# Altium PCB PCB.PcbDoc (part 2 of 3)
Units mm, origin at the board's own origin, x right, y up, seen from the top; angles counter-clockwise.
Board outline 68.58 x 53.34 mm, 4 copper layers (TOP, GND, SIG, BOTTOM), stack 1.586 mm thick; 257 components, 121 nets, 724 pads, 316 vias.
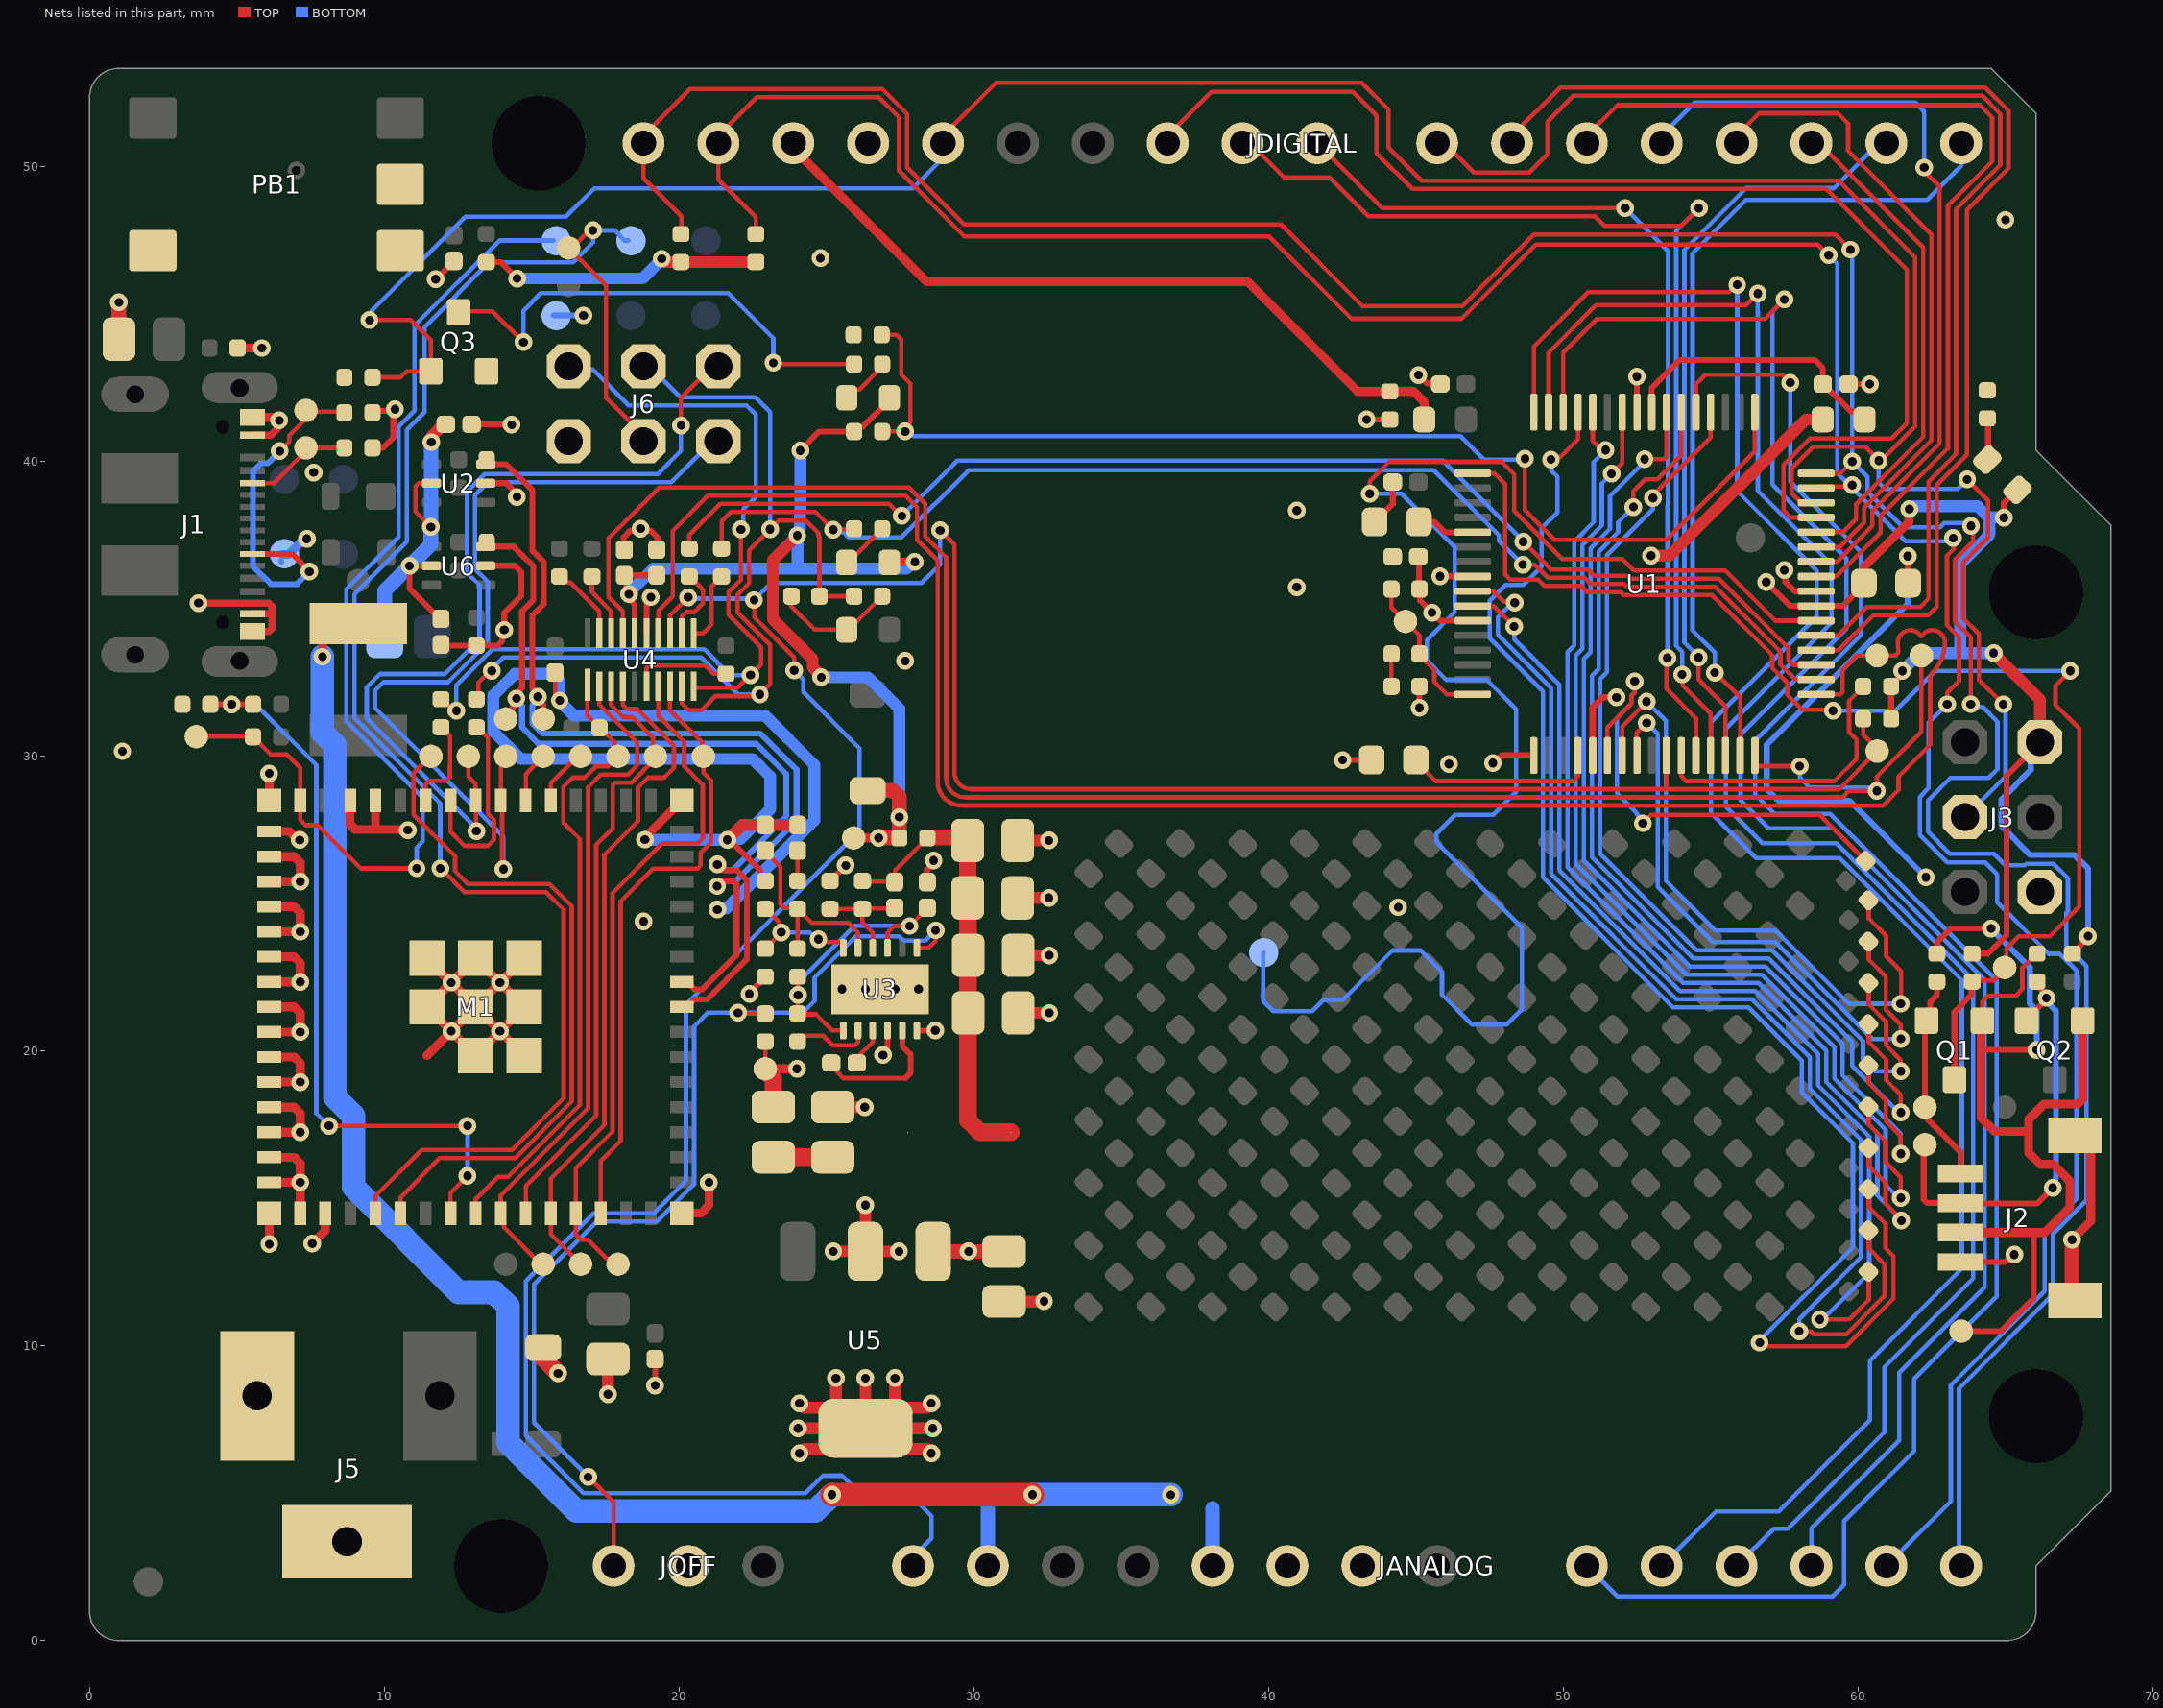
[diagram p4: the nets of this part, all layers, seen from the top]

## Via types
v1: diameter 0.6, hole 0.3, TOP to BOTTOM, tented both sides, 316 vias

## Nets (pads, with @x,y where several pads share a name; then routed paths per layer and width w, separated by ;. In a path a pad name is that pad's centre, name@x,y a point inside that pad or via, vN(x,y) a via of type N, cw(c..) or ccw(c..) an arc to the next point about the centre after c; other vN are vias at no path point) (continued)
+3V3_I2C: 3V3_IC.X F1.1 J2.2 Q1.1 Q2.1 R9.1 R11.1 | length 91.3
  TOP w0.15: Q1.1@64.22,21.035 64.22,21.689 64.411,21.88 65.35,21.88 65.572,22.102 65.572,22.816 ccw(c64.97,22.834) 65.572,22.826 R11.1@66.055,23.309
  TOP w0.2: R9.1@62.67,23.309 62.67,23.684 63.144,24.159 v1(64.51,24.159) ; 3V3_IC.X@63.5,10.5 64.837,10.5 65.954,11.617 65.954,13.846 ; 64.17,20.134 64.264,20.04 v1(66.06,20.04) ; R11.1@66.055,23.309 R11.1@66.07,23.309
  TOP w0.3: v1(7.904,33.382) 7.904,33.953 8.454,34.503 F1.1@9.125,34.503 ; J2.2@63.482,13.846 65.954,13.846 66.329,13.846 67.181,14.698 67.181,15.6 66.623,16.158 66.181,16.158 65.787,16.552 65.787,17.273 ; Q1.1@64.22,21.035 64.17,20.985 64.17,20.134 64.17,17.734 64.632,17.273 65.787,17.273 ; Q2.1@67.62,21.035 67.62,18.377 67.444,18.202 66.306,18.202 65.787,17.683 65.787,17.273
  TOP w0.8: v1(25.19,4.956) v1(31.99,4.956)
  BOTTOM w0.2: v1(64.51,24.159) 65.827,22.842 65.827,21.621 66.06,21.388 v1(66.06,20.04)
  BOTTOM w0.8: v1(7.904,33.382) 7.904,30.811 8.325,30.39 8.325,18.435 8.952,17.809 8.952,15.396 12.529,11.819 13.729,11.819 14.198,11.35 14.198,6.712 16.512,4.398 24.632,4.398 v1(25.19,4.956) ; v1(31.99,4.956) 31.995,4.951 v1(36.684,4.951)
+5V: 5V_TOP.X C2.2 C3.2 C24.2 C25.2 C28.2 C29.2 C30.2 D2.C DL1.A DL3.A DL4.A J3.2 JANALOG.2 JANALOG.5 L2.1 R3.2 R4.2 R5.2 R6.2 R7.1 R8.1 R10.1 R12.1 R13.1 R36.2 R59.2 SJ1.1 U1.11 U1.21 U1.39 U2.5 U4.16 U5.1 U6.5 | length 126.8
  TOP w0.15: v1(11.583,37.779) 11.062,38.3 11.062,39.162 11.166,39.266 U2.5@11.605,39.266
  TOP w0.2: v1(10.859,36.462) 10.859,35.691 11.735,34.815 11.735,34.809 11.925,34.619 C29.2@11.925,34.566 ; v1@10.859,36.466 U6.5@11.605,36.466 ; R3.2@13.466,46.769 13.949,46.769 v1(14.509,46.21) ; v1@18.139,35.509 v1@18.291,35.509 ; v1@18.224,35.424 18.496,35.152 U4.16@18.496,34.176 ; v1(18.3,35.5) v1@18.291,35.509 ; C25.2@19.246,36.141 C24.2@18.146,36.141 18.223,36.064 18.223,35.577 v1@18.291,35.509 ; v1(24.116,40.376) 24.761,41.021 R59.2@25.941,41.021 26.106,41.186 26.238,41.186 27.141,42.089 DL4.A@27.141,42.164 ; v1(43.328,41.428) R6.2@44.115,41.428 ; C3.2@45.081,36.776 45.101,36.756 45.101,35.696 R13.1@45.121,35.676 45.136,35.661 45.136,35.286 v1(45.546,34.876) 45.819,34.603 U1.11@46.925,34.603 ; v1(56.888,35.913) 57.698,35.103 U1.39@58.575,35.103 59.473,35.103 60.196,35.826 C2.2@60.196,35.876 ; R8.1@61.121,31.276 R7.1@61.121,32.376 61.121,32.413 61.5,32.792 v1(61.5,32.9) ; R10.1@63.87,23.309 64.406,23.31 65.037,23.941 65.037,29.35 J3.2@66.167,30.48 ; v1(64.945,38.098) 64.945,38.6 65.384,39.04 DL3.A@65.41,39.04 ; R12.1@67.27,23.309 67.27,23.316 67.8,23.846 v1(67.8,23.9)
  TOP w0.22: U1.21@51,30.028 51,31.666 51.335,32.001 v1(51.807,32.001)
  TOP w0.3: 5V_TOP.X@25.925,27.235 v1(26.773,27.235) ; DL1.A@27.141,36.576 27.153,36.588 27.988,36.588 v1(28,36.6) ; C2.2@60.196,35.876 60.196,36.421 61.722,37.947 61.722,38.368 v1(61.741,38.388)
  TOP w0.4: v1@11.608,40.672 11.633,40.697 11.633,40.88 11.929,41.176 11.975,41.176 C30.2@12.077,41.278 ; v1(19.416,46.88) 19.526,46.77 R4.2@20.066,46.769 R4.2@20.066,46.769 R5.2@22.606,46.769 ; v1(24.016,37.494) 23.181,36.659 23.181,34.655 24.536,33.3 24.536,33.026 24.825,32.736 v1(24.825,32.682) ; v1(52.98,36.81) 53.607,36.81 58.225,41.428 L2.1@58.8,41.428 ; v1(64.6,33.5) 66.167,31.933 J3.2@66.167,30.48
  TOP w0.5: D2.C@26.396,28.841 27.259,28.841 27.475,28.625 v1(27.475,27.937) R36.2@27.475,27.235 v1(26.773,27.235) ; U5.1@28.625,13.206 v1(29.825,13.206) C28.2@31.025,13.206
  BOTTOM w0.2: J3.2@66.167,30.48 65.86,30.173 65.86,29.54 64.86,28.54 64.86,27.64 65.845,26.654 67.346,26.654 67.8,26.2 v1(67.8,23.9)
  BOTTOM w0.3: JANALOG.2@30.48,2.54 JANALOG.2@30.523,2.497
  BOTTOM w0.4: v1(14.509,46.21) 18.766,46.21 19.416,46.86 v1(19.416,46.88) ; v1(18.3,35.5) 18.3,35.543 19.123,36.366 23.966,36.366 ; v1(24.016,37.494) 24.018,37.491 24.018,36.418 23.966,36.366 ; v1@24.106,37.726 24.106,38.263 24.116,38.273 v1(24.116,40.376) ; v1(24.825,32.682) 26.418,32.682 27.475,31.625 v1(27.475,27.937) ; v1(28,36.6) 27.946,36.6 27.712,36.366 23.966,36.366 ; v1(61.5,32.9) 62.1,33.5 63.462,33.5 ; v1(61.741,38.388) 61.813,38.388 61.91,38.485 64.053,38.485 64.429,38.108 ; v1(64.6,33.5) 63.462,33.5 ; v1(64.945,38.098) 64.935,38.108 64.429,38.108 ; 63.462,33.5 63.462,36.518 64.085,37.142 64.453,37.509 64.453,37.558 64.457,37.562 64.457,38.081 64.429,38.108
  BOTTOM w0.5: SJ1.1@10.016,34.066 10.016,35.619 v1(10.859,36.462) 11.583,37.186 v1(11.583,37.779) 11.589,37.785 11.589,40.654 v1(11.595,40.659) ; JANALOG.2@30.48,2.54 30.48,4.48 ; JANALOG.5@38.1,2.54 38.1,4.48
AREF_1: JDIGITAL.16 L1.1 R6.1 | length 25.7
  TOP w0.3: JDIGITAL.16@23.876,50.8 23.876,50.624 28.4,46.1 39.3,46.1 43.022,42.378 R6.1@44.115,42.378 44.922,42.378 45.28,42.02 L1.1@45.28,41.428
CC1_1: CC1.X J1.A5 R50.2 | length 3.5
  TOP w0.15: J1.A5@5.525,39.266 6.25,39.266 7.35,40.366 CC1.X@7.35,40.466 R50.2@8.45,40.466
CC2_1: CC2.X J1.B5 R51.2 | length 11.8
  TOP w0.15: v1(6.456,40.354) 6.771,40.668 6.771,40.887 7.226,41.342 7.226,41.612 CC2.X@7.35,41.736 7.388,41.698 8.412,41.698 R51.2@8.45,41.66
  TOP w0.2: J1.B5@5.525,36.866 6.874,36.866 7.463,36.277 v1(7.463,36.267)
  BOTTOM w0.2: v1(6.456,40.354) 6.045,39.942 5.812,39.942 5.55,39.68 5.55,36.442 6.151,35.84 7.036,35.84 v1(7.463,36.267)
ESP32_ENABLE_1: ESP_EN_BOTTOM.X ESP_EN_TOP.X M1.45 R26.2 | length 36.8
  TOP w0.15: ESP_EN_TOP.X@3.625,30.666 R26.2@5.55,30.666 6.15,30.066 6.699,30.066 7.15,29.615 M1.45@7.15,28.5 7.15,27.85 7.334,27.666 7.734,27.666 9.2,26.2 v1(11.1,26.2)
  BOTTOM w0.15: v1(11.1,26.2) 11.1,26.914 11.302,27.116 11.302,28.604 8.718,31.188 8.718,35.675 10.49,37.448 10.49,41.195 11.025,41.73 11.025,44.617 13.906,47.498 ESP_EN_BOTTOM.X@15.748,47.498
ESP_1_N: D-_TOP.X M1.23 R53.1 U6.3 | length 29.6
  TOP w0.2: U6.3@13.445,37.116 13.445,37.236 R53.1@13.475,37.266 ; R53.1@13.475,37.116 14.389,37.116 14.697,36.808 15.059,36.446 15.059,35.309 14.673,34.923 14.673,32.314 14.484,32.126 v1@14.484,32.018 ; D-_TOP.X@14.125,31.27 14.125,31.412 14.408,31.694 14.408,31.887 v1(14.484,31.964) ; M1.23@20.1,21.5 20.3,21.5 20.4,21.6 20.4,21.633 20.517,21.75 20.945,21.75 22.303,23.108 22.303,25.805 21.976,26.132 21.969,26.132 21.964,26.137 21.498,26.137 v1(21.304,26.332)
  BOTTOM w0.2: v1(14.484,31.964) 14.484,31.909 14.673,31.721 14.673,30.987 15.236,30.425 22.62,30.425 23.64,29.405 23.64,27.971 21.8,26.132 21.612,26.132 21.412,26.332 v1(21.304,26.332)
ESP_1_P: D+_TOP.X M1.24 R21.1 U2.3 | length 31.7
  TOP w0.2: U2.3@13.445,39.916 14.129,39.916 15.027,39.018 15.027,36.973 15.409,36.591 15.409,35.164 15.023,34.778 15.023,32.314 15.211,32.126 15.211,31.909 15.395,31.726 D+_TOP.X@15.395,31.27 ; M1.24@20.1,22.35 20.3,22.35 20.4,22.25 20.4,22.217 20.517,22.1 20.8,22.1 21.953,23.253 21.953,25.66 21.831,25.782 21.482,25.782 v1(21.295,25.595)
  BOTTOM w0.2: v1(15.211,32.018) 15.211,31.909 15.023,31.721 15.023,31.132 15.38,30.775 22.765,30.775 23.99,29.55 23.99,27.826 21.945,25.782 21.589,25.782 21.403,25.595 v1(21.295,25.595)
ESP_DOWNLOAD_1: ESP_DOWNLOAD_BOTTOM1.X ESP_DOWNLOAD_TOP.X J6.4 M1.4 | length 56.9
  TOP w0.15: M1.4@9.7,14.5 9.7,15.08 11.268,16.648 14.327,16.648 16.084,18.405 16.084,24.8 15.486,25.397 12.723,25.397 11.92,26.2 v1(11.9,26.2) ; ESP_DOWNLOAD_TOP.X@16.256,47.244 17.525,45.975 17.525,42.165 J6.4@18.796,40.894 ; ESP_DOWNLOAD_TOP.X@16.358,47.234 16.968,47.843 v1(17.08,47.843)
  BOTTOM w0.15: v1(11.9,26.2) 11.9,28.397 8.995,31.303 8.995,35.503 10.767,37.276 10.767,41.08 11.366,41.679 11.366,44.566 13.554,46.754 16.399,46.754 17.08,47.435 v1@17.08,47.717 ; v1@17.143,47.843 17.82,47.843 18.165,47.498 ESP_DOWNLOAD_BOTTOM1.X@18.288,47.498
ESP_IO1_1: ESP_IO1.X M1.5 | length 23.5
  TOP w0.15: M1.5@10.55,14.5 10.55,15.041 11.88,16.371 14.441,16.371 16.361,18.291 16.361,24.914 15.601,25.674 12.838,25.674 12.402,26.11 12.402,26.608 10.998,28.012 10.998,29.433 11.565,30 ESP_IO1.X@11.585,30
ESP_IO4_1: ESP_IO4.X M1.8 R58.1 U4.1 | length 21.2
  TOP w0.15: M1.8@13.1,14.5 13.1,14.975 13.859,15.734 14.196,15.734 16.638,18.176 16.638,27.194 16.081,27.75 16.081,28.967 16.39,29.276 16.792,29.276 17.18,29.663 17.598,29.663 17.754,29.819 ESP_IO4.X@17.754,29.881 ; U4.1@16.896,32.426 16.896,31.385 17.3,30.981 R58.1@17.3,30.966 ; R58.1@17.425,30.866 17.811,30.48 17.811,30.124 ESP_IO4.X@17.935,30
ESP_IO5_1: ESP_IO5.X M1.9 U4.2 | length 23
  TOP w0.15: M1.9@13.95,14.2 14.04,14.2 14.065,14.175 14.065,14.025 15.315,12.775 ESP_IO5.X@15.395,12.775 ; M1.9@13.95,14.5 13.95,15.096 16.915,18.061 16.915,27.607 16.915,28.951 17.351,29.386 18.267,29.386 18.58,29.699 18.58,30.467 17.296,31.751 U4.2@17.296,32.376
ESP_IO6_1: ESP_IO6.X M1.10 U4.3 | length 20.9
  TOP w0.15: M1.10@14.8,14.5 14.8,15.43 17.192,17.822 17.192,27.003 17.752,27.563 17.752,29.022 17.84,29.109 18.382,29.109 19.205,29.932 ESP_IO6.X@19.205,30.057 ; U4.3@17.696,32.376 17.696,31.743 18.109,31.33 18.425,31.33 19.125,30.63 19.125,30.08 ESP_IO6.X@19.205,30
ESP_IO7_1: ESP_IO7.X M1.11 U4.4 | length 22.7
  TOP w0.15: M1.11@15.65,14.2 15.65,13.79 ESP_IO7.X@16.665,12.775 ; M1.11@15.65,14.5 15.65,15.68 17.469,17.499 17.469,26.662 18.608,27.801 18.608,28.944 18.94,29.276 19.489,29.276 19.828,29.615 19.828,30.363 18.584,31.607 18.237,31.607 18.096,31.748 U4.4@18.096,32.376
ESP_IO8_1: ESP_IO8.X M1.12 U4.7 | length 23.6
  TOP w0.15: ESP_IO8.X@17.935,12.599 17.567,12.967 17.543,12.967 16.91,13.6 16.68,13.6 16.5,13.78 M1.12@16.5,14.5 16.5,16.03 17.746,17.276 17.746,25.366 19.428,27.048 20.638,27.048 20.806,27.215 20.806,29.031 20.173,29.664 20.173,30.497 19.296,31.374 U4.7@19.296,32.376
ESP_IO9_1: ESP_IO9.X M1.13 U4.8 | length 20.9
  TOP w0.15: M1.13@17.35,14.5 17.35,16.28 18.023,16.953 18.023,25.088 19.125,26.19 20.624,26.19 20.733,26.299 20.733,26.722 21.083,27.072 21.083,29.183 20.825,29.441 ESP_IO9.X@20.825,30 ; U4.8@19.696,32.376 19.696,31.57 20.789,30.477 20.789,30.077 ESP_IO9.X@20.846,30.021
ESP_IO41_1: ESP_MTDI.X J6.2 M1.37 | length 30.6
  TOP w0.15: M1.37@13.944,28.494 13.998,28.44 13.998,26.224 v1(14.046,26.176) ; M1.37@13.957,28.493 13.957,29.656 14.125,29.824 ESP_MTDI.X@14.125,30
  BOTTOM w0.15: v1(14.046,26.176) 14.046,27.285 9.684,31.647 9.684,32.237 9.964,32.518 11.624,32.518 11.901,32.518 12.163,32.518 13.511,33.866 13.511,34.127 13.511,34.404 13.511,35.923 13.079,36.355 13.079,38.865 13.516,39.302 19.744,39.302 J6.2@21.336,40.894
ESP_IO42_1: ESP_MTMS.X J6.1 M1.38 | length 30.2
  TOP w0.15: ESP_MTMS.X@12.855,30 12.855,29.315 13.1,29.07 M1.38@13.1,28.5 13.113,28.487 13.113,27.479 v1(13.125,27.466) ; v1(20.071,41.227) 20.066,41.231 20.066,42.164 J6.1@21.336,43.434
  BOTTOM w0.15: v1(13.125,27.466) 13.125,27.564 9.407,31.282 9.407,32.352 9.85,32.795 12.048,32.795 13.234,33.98 13.234,35.809 12.802,36.24 12.802,38.98 13.401,39.579 19.284,39.579 20.071,40.366 v1(20.071,41.227)
ESP_MTCK_1: ESP_MTCK.X M1.35 | length 2
  TOP w0.15: M1.35@15.65,28.5 15.65,29.085 ESP_MTCK.X@16.565,30 ; ESP_MTCK.X@16.565,29.7 ESP_MTCK.X@16.665,29.7
ESP_MTDO_1: ESP_MTDO.X M1.36 | length 1.7
  TOP w0.15: M1.36@14.8,28.5 14.8,29.405 ESP_MTDO.X@15.395,30
ESP_RXD0_1: J6.5 R18.1 U4.10 | length 31.4
  TOP w0.15: R18.1@11.94,31.926 11.991,31.926 12.365,31.551 v1(12.45,31.551) ; U4.10@20.496,32.376 20.521,32.351 20.521,32.324 21.987,32.324 v1(22.423,32.76) 22.781,33.117 22.781,33.703 21.683,34.801 21.683,35.57 22.1,35.986 v1(22.1,37.7)
  BOTTOM w0.15: v1(12.45,31.551) 12.45,32.413 13.666,33.629 20.863,33.629 21.732,32.76 v1(22.423,32.76) ; J6.5@16.256,43.434 16.571,43.119 17.081,43.119 18.296,41.904 22.287,41.904 22.6,41.591 22.6,38.8 22.186,38.386 22.186,37.786 v1(22.1,37.7)
ESP_TXD0_1: J6.3 R17.1 R20.1 R23.1 U4.9 | length 36
  TOP w0.15: R17.1@13.197,31.907 13.197,32.5 13.596,32.899 v1(13.646,32.899) ; U4.9@20.096,32.376 20.096,31.801 20.333,31.564 20.756,31.564 ; 21.12,31.928 20.756,31.564 ; v1@22.691,32.047 21.239,32.047 20.756,31.564 ; v1(22.745,32.101) 23.1,32.456 23.1,33.776 21.99,34.886 21.99,35.485 22.377,35.872 22.377,36.993 v1(23.088,37.704) 23.379,37.996 24.304,37.996 24.729,37.571 24.729,37.481 24.765,37.445 R20.1@24.765,35.433 R23.1@25.941,35.433
  BOTTOM w0.15: v1(13.646,32.899) 13.646,32.956 14.042,33.352 20.748,33.352 21.999,32.101 v1(22.745,32.101) ; J6.3@18.796,43.434 20.049,42.181 22.585,42.181 23.088,41.678 v1(23.088,37.704)
EXT_SCL_1: EXT_SCL.X J2.4 Q1.2 R9.2 | length 7.2
  TOP w0.2: R9.2@62.67,22.359 62.67,21.89 62.448,21.667 62.448,21.162 Q1.2@62.32,21.035 62.27,20.984 EXT_SCL.X@62.27,18.096 62.384,17.981 62.384,17.659 63.482,16.561 J2.4@63.482,15.846
EXT_SDA_1: EXT_SDA.X J2.3 Q2.2 R11.2 | length 14.9
  TOP w0.2: EXT_SDA.X@62.27,16.826 62.225,16.781 62.225,14.963 62.342,14.846 J2.3@63.482,14.846 63.5,14.828 66.071,14.828 v1(66.604,15.361) ; Q2.2@65.72,21.035 65.72,21.085 66.391,21.756 v1(66.391,21.802) 66.391,21.91 66.235,22.066 66.235,22.194 R11.2@66.07,22.359
  BOTTOM w0.2: v1(66.391,21.802) 66.391,21.694 66.709,21.376 66.709,15.678 66.68,15.65 66.68,15.437 v1(66.604,15.361)
GND: C1.2 C2.1 C3.1 C5.1 C6.2 C7.1 C8.1 C9.1 C10.1 C11.1 C15.1 C16.1 C17.1 C18.1 C19.1 C20.2 C21.1 C22.1 C23.1 C24.1 C25.1 C26.1 C28.1 C29.1 C30.1 GND2.X GND.X J1.A1 J1.A12 J1.B1 J1.B12 J2.1 J2.FIX J3.6 J5.2 J5.3 J6.6 JANALOG.6 JANALOG.7 JDIGITAL.15 JOFF.2 M1.1 M1.2 M1.42 M1.43 M1.46 M1.47 M1.48 M1.49 M1.50 M1.51 M1.52 M1.53 M1.54 M1.55 M1.56 M1.57 M1.58 M1.59 M1.60 M1.61 M1.62 M1.63 M1.64 M1.65 PB1.1 PB1.2 PB1.5 Q3.2 R1.1 R19.2 R24.1 R39.1 R40.1 R43.1 R44.1 R50.1 R51.1 R52.1 R57.1 R60.1 U1.8 U1.17 U1.40 U1.57 U2.2 U3.6 U3.13 U4.15 U5.2 U5.4 U6.2 | length 190.5
  TOP w0.15: C26.1@15.796,32.841 15.796,32.137 15.952,31.981 v1(15.952,31.9)
  TOP w0.2: R50.1@9.6,40.466 9.966,40.466 10.312,40.812 10.312,41.727 v1(10.363,41.778) 10.304,41.719 9.772,41.719 9.737,41.684 R51.1@9.737,41.66 ; v1(11.741,46.187) 11.755,46.187 12.366,46.798 C1.2@12.366,46.809 ; C29.1@11.925,33.796 11.965,33.756 13.853,33.756 14.005,33.908 14.005,34.223 v1(14.072,34.29) 14.072,34.872 14.653,35.453 14.653,36.247 14.434,36.466 U6.2@13.445,36.466 ; C30.1@12.96,41.266 12.963,41.263 14.309,41.263 v1(14.321,41.25) ; U2.2@13.445,39.266 14.134,39.266 14.5,38.9 v1(14.5,38.8) ; v1@14.245,41.327 v1@14.298,41.274 ; C24.1@18.146,37.011 18.121,37.036 18.121,37.426 18.343,37.648 18.617,37.648 v1(18.694,37.724) 18.77,37.648 19.045,37.648 19.267,37.426 19.267,37.036 C25.1@19.242,37.011 ; U4.15@18.896,34.176 18.896,35.144 19.044,35.292 v1(19.044,35.4) ; v1(19.19,8.656) C11.1@19.19,9.556 ; v1@21.715,27.172 22.765,26.122 22.765,25.935 R43.1@22.925,25.775 ; v1@22.389,21.982 22.925,22.518 R44.1@22.925,22.525 ; R40.1@25.134,25.777 25.138,25.777 25.656,26.295 v1(25.656,26.299) ; U3.6@28.075,20.7 v1(28.699,20.7) ; C20.2@28.425,25.735 28.417,25.743 28.417,26.15 28.639,26.373 v1(28.639,26.466) ; v1(42.515,29.876) C5.1@43.496,29.876 ; C9.1@43.6,37.953 44.215,38.568 C8.1@44.215,39.306 ; v1(45.086,42.938) 45.381,42.643 45.815,42.643 C7.1@45.83,42.628 ; v1@45.12,31.645 R19.2@45.121,32.376 ; v1(45.819,36.11) 45.822,36.106 46.921,36.106 U1.8@46.925,36.103 ; v1(47.611,29.771) 47.654,29.771 47.915,30.032 48.975,30.032 48.979,30.028 U1.17@49,30.028 ; v1(52.498,42.884) 52.5,42.882 U1.57@52.5,41.678 ; v1(57.501,36.314) 57.539,36.276 57.539,35.914 57.85,35.603 U1.40@58.575,35.603 ; C6.2@59.67,42.628 v1(60.398,42.628) v1@60.506,42.628 ; v1(61.684,36.795) 61.69,36.789 61.69,35.882 C2.1@61.696,35.876 ; J2.1@63.448,12.88 J2.1@63.482,12.846 64.988,12.846 65.242,13.1 v1(65.3,13.1)
  TOP w0.25: v1(3.7,35.2) 6.083,35.2 6.2,35.083 6.2,34.9 ; J1.A12@5.525,34.231 6.083,34.231 6.2,34.348 6.2,34.9 ; J1.B1@5.525,34.841 6.141,34.841 6.2,34.9 ; J1.B12@5.525,40.891 6.155,40.891 6.401,41.137 6.401,41.234 6.441,41.274 v1(6.441,41.396)
  TOP w0.3: R39.1@5.025,43.853 v1(5.85,43.853) ; J1.A1@5.525,41.501 6.254,41.502 6.302,41.453 6.384,41.453 v1(6.441,41.396) ; v1(6.098,29.419) v1(6.098,29.419) 6.099,28.501 M1.65@6.1,28.5 ; v1(6.1,13.45) M1.62@6.1,14.5 ; M1.60@6.1,15.55 v1(7.15,15.55) ; M1.59@6.1,16.4 6.946,16.4 7.15,16.196 v1(7.15,15.55) ; M1.58@6.1,17.25 v1(7.15,17.25) 7.15,17.896 6.946,18.1 M1.57@6.1,18.1 ; M1.56@6.1,18.95 v1(7.15,18.95) 7.15,19.596 6.946,19.8 M1.55@6.1,19.8 ; M1.54@6.1,20.65 v1(7.15,20.65) 7.15,21.296 6.946,21.5 M1.53@6.1,21.5 ; M1.52@6.1,22.35 v1(7.15,22.35) 7.15,22.996 6.946,23.2 M1.51@6.1,23.2 ; M1.50@6.1,24.05 v1(7.15,24.05) 7.15,24.696 6.946,24.9 M1.49@6.1,24.9 ; M1.48@6.1,25.75 v1(7.15,25.75) 7.15,26.396 6.946,26.6 M1.47@6.1,26.6 ; M1.46@6.1,27.45 6.785,27.45 7.071,27.164 v1(7.135,27.164) ; M1.1@7.15,14.5 v1(7.15,15.55) ; v1(7.56,13.471) 8,13.91 M1.2@8,14.5 ; M1.43@8.841,28.491 8.841,27.696 9.017,27.52 9.722,27.52 ; M1.42@9.7,28.5 9.7,27.6 9.782,27.518 10.782,27.518 v1(10.8,27.5) ; M1.61@11.45,19.85 v1(12.275,20.675) ; M1.61@11.45,23.15 v1(12.275,22.325) ; M1.61@14.75,19.85 v1(13.925,20.675) ; M1.61@14.75,23.15 v1(13.925,22.325) ; v1(18.846,27.176) 18.846,27.246 M1.64@20.1,28.5 ; M1.63@20.1,14.5 20.104,14.504 20.744,14.504 21.014,14.774 v1(21.014,15.546) ; v1(67.256,13.6) 67.895,14.239 67.895,16.696 67.445,17.146 J2.FIX@67.357,17.146 ; v1(12.275,20.675) M1.61@13.1,21.5 ; v1(12.275,20.675) M1.61@11.45,21.5 v1(12.275,22.325) ; v1(12.275,20.675) M1.61@13.1,19.85 v1(13.925,20.675) ; v1(12.275,22.325) M1.61@13.1,23.15 v1(13.925,22.325) ; v1(12.275,22.325) M1.61@13.1,21.5 ; M1.61@13.1,21.5 v1(13.925,20.675) ; M1.61@13.1,21.5 v1(13.925,22.325) ; v1(13.925,20.675) M1.61@14.75,21.5 v1(13.925,22.325)
  TOP w0.4: v1(17.59,8.356) C10.1@17.59,9.556 ; v1(21.638,27.166) 22.143,27.67 C22.1@24.025,27.67 C22.1@24.023,27.668 ; v1(24.04,7.206) U5.4@26.325,7.206 ; v1(24.09,6.356) 24.24,6.506 28.41,6.506 v1(28.56,6.356) ; v1(24.09,8.056) 24.24,7.906 28.41,7.906 v1(28.56,8.056) ; C19.1@25.216,18.103 25.217,18.102 26.298,18.102 v1(26.3,18.1) ; v1(25.237,13.206) U5.2@26.325,13.206 ; U5.4@25.325,7.206 v1(25.325,8.906) ; v1(26.325,8.906) U5.4@26.325,7.206 ; v1(26.325,14.775) U5.2@26.325,13.206 ; U5.4@27.325,7.206 v1(27.325,8.906) ; v1(27.465,13.206) U5.2@26.325,13.206 ; v1(28.61,7.206) U5.4@26.325,7.206 ; C28.1@31.025,11.506 32.373,11.506 v1(32.385,11.518) ; C17.1@31.495,25.196 v1(32.55,25.196) ; C18.1@31.495,27.146 v1(32.55,27.146) ; C15.1@31.51,21.298 v1(32.565,21.298) ; C16.1@31.51,23.248 v1(32.565,23.248)
  TOP w0.5: C21.1@1,44.153 v1(1,45.403) ; v1(67.256,13.6) 67.256,11.546 J2.FIX@67.357,11.546
  BOTTOM w0.2: GND.X@6.5,36.616 GND.X@6.508,36.608 ; GND2.X@15.748,44.958 v1(16.758,44.958) ; v1(61.684,36.795) 61.684,35.184 56.9,30.4 56.9,28.9 57.3,28.5 59.7,28.5 v1(62.3,25.9)
  BOTTOM w0.3: GND.X@6.52,36.85 6.766,36.85 7.292,37.376 v1(7.373,37.376)
  BOTTOM w0.4: v1(18.846,27.176) 18.851,27.171 21.633,27.171 v1(21.638,27.166) 21.668,27.195 22.082,27.195 23.094,28.207 23.094,29.316 22.498,29.912 14.635,29.912 13.7,30.846 13.7,32.066 14.433,32.8 15.718,32.8 15.952,32.565 15.952,31.868 16.438,31.382 22.918,31.382 24.594,29.706 24.594,27.826 21.606,24.838 21.338,24.838 v1(21.3,24.8)
  other v1: 22.389,21.939 25.525,22.1 26.325,22.1 27.325,22.1 28.125,22.1 18.8,24.4 44.399,24.88 46.124,29.739 1.118,30.173 45.12,31.644 27.675,33.237 40.96,35.74 40.96,38.34 7.611,39.631 24.8,46.9 65,48.2
ISL_VCC_1: C20.1 R37.2 R42.2 U3.1 U3.9 | length 10.2
  TOP w0.15: R37.2@24.025,21.275 24.052,21.248 24.651,21.248 25.199,20.7 U3.1@25.575,20.7 ; R37.2@24.025,21.475 R42.2@24.025,22.525 R42.2@24.115,22.615 ; U3.9@27.075,23.5 27.075,24.026 27.294,24.245 v1(27.826,24.245) 28.425,24.844 C20.1@28.425,24.865
  BOTTOM w0.15: v1(24.037,21.903) 24.037,22.329 25.96,24.252 27.818,24.252 v1(27.826,24.245)
MD_1: JANALOG.1 MD.X R8.2 U1.26 U4.13 | length 107.7
  TOP w0.15: U4.13@19.696,34.176 19.696,34.782 v1(20.312,35.398) ; v1(22.545,35.302) 22.566,35.281 22.566,34.702 23.909,33.359 v1(23.909,32.915) ; v1(28.859,37.667) 29.347,37.179 29.347,29.457 ccw(c29.918,29.457) 29.918,28.886 53.5,28.886 U1.26@53.5,30.028 ; 53.5,28.885 59.355,28.885 60.585,30.115 60.585,30.32 60.171,30.734 R8.2@60.171,31.276
  BOTTOM w0.15: v1(20.312,35.398) 20.399,35.398 20.447,35.35 22.497,35.35 v1(22.545,35.302) 23.12,35.877 28.228,35.877 28.859,36.508 v1(28.859,37.667) ; v1(23.909,32.915) 24.218,32.606 24.218,32.182 26.129,30.271 26.129,27.482 20.235,21.588 20.235,15.6 19.135,14.5 17.1,14.5 14.8,12.2 14.8,6.961 16.761,5 24.28,5 24.88,5.6 25.535,5.6 26.449,4.686 28.114,4.686 28.571,4.229 28.571,3.471 28.082,2.982 28.082,2.682 JANALOG.1@27.94,2.54
NetBUCK_IN_TOP_X: BUCK_IN_TOP.X C13.2 D1.C R35.1 U3.4 | length 5.4
  TOP w0.15: BUCK_IN_TOP.X@22.925,19.4 R35.1@22.925,20.325
  TOP w0.2: v1(26.92,19.868) 26.92,19.976 27.075,20.131 U3.4@27.075,20.7
  TOP w0.3: BUCK_IN_TOP.X@22.925,19.4 v1(24,19.4)
  TOP w0.6: D1.C@15.395,9.941 15.395,9.571 v1(15.895,9.071) ; BUCK_IN_TOP.X@22.925,19.4 22.925,19.346 23.199,19.072 C13.2@23.199,18.103
NetC5_2: C5.2 U1.20 | length 6.6
  TOP w0.15: C5.2@44.996,29.876 44.996,29.826 45.659,29.163 50.334,29.163 50.5,29.328 U1.20@50.5,30.028
NetC6_1: C6.1 L2.2 U1.56 | length 9.6
  TOP w0.2: U1.56@53,41.678 53,42.498 53.949,43.446 58.527,43.446 58.8,43.173 C6.1@58.8,42.628 58.825,42.628 59.746,41.707 59.952,41.707 60.22,41.439 L2.2@60.22,41.428
NetC9_2: C9.2 U1.5 | length 2
  TOP w0.2: C9.2@45.1,37.953 45.625,37.953 45.975,37.603 U1.5@46.925,37.603
NetC12_1: C12.1 L3.1 U3.5 | length 4.6
  TOP w0.15: C12.1@25.165,19.6 25.358,19.407 25.358,19.3 25.576,19.082 27.676,19.082
  TOP w0.2: U3.5@27.575,20.7 27.575,20.167 27.854,19.887 27.854,19.261 27.676,19.082
NetC12_2: C12.2 U3.3 | length 1.5
  TOP w0.15: C12.2@26.035,19.4 26.035,19.773 26.575,20.313 U3.3@26.575,20.7
NetC13_1: C13.1 C19.2 | length 2
  TOP w0.6: C13.1@23.199,16.403 C19.2@25.216,16.403
NetC14_1: C14.1 R38.2 R40.2 U3.10 | length 3.7
  TOP w0.15: R40.2@25.125,24.825 R38.2@26.225,24.825 ; U3.10@26.575,23.5 26.575,24.018 26.226,24.367 26.226,24.824 R38.2@26.225,24.825 ; C14.1@27.325,24.865 27.305,24.845 26.245,24.845 R38.2@26.225,24.825
NetC14_2: C14.2 C15.2 C16.2 C17.2 C18.2 L3.2 R36.1 R38.1 | length 15.4
  TOP w0.15: R38.1@26.225,25.775 26.245,25.755 C14.2@27.305,25.755 ; C14.2@27.325,25.735 27.325,26.125 28.425,27.225 R36.1@28.425,27.235
  TOP w0.5: R36.1@28.425,27.235 29.325,27.235 29.329,27.231 29.49,27.231 29.795,26.926 C18.2@29.795,26.765
  TOP w0.6: C17.2@29.795,24.796 C18.2@29.795,26.746 ; C17.2@29.802,24.796 29.802,22.848 29.802,20.871 29.81,20.863 29.81,17.647 30.208,17.248 L3.2@31.258,17.248
NetC22_2: C22.2 R41.1 | length 1
  TOP w0.15: R41.1@24.025,25.775 C22.2@24.025,26.8
NetC23_2: C23.2 R41.2 R42.1 U3.11 | length 6.9
  TOP w0.15: C23.2@22.925,26.8 22.925,26.775 23.437,26.263 23.437,24.988 23.573,24.852 23.998,24.852 24.502,24.348 25.745,24.348 26.075,24.018 U3.11@26.075,23.5 ; R42.1@24.025,23.475 R41.2@24.025,24.825
NetDL1_C: DL1.C R22.2 | length 1.7
  TOP w0.15: DL1.C@25.691,36.576 25.691,36.594 25.968,36.871 26.043,36.871 R22.2@26.891,37.719
NetDL2_C: DL2.C R20.2 R23.2 | length 4.3
  TOP w0.15: R20.2@23.8,35.507 23.8,35.1 24.6,34.3 25.681,34.3 DL2.C@25.691,34.29 ; DL2.C@25.691,34.308 25.968,34.585 26.043,34.585 R23.2@26.891,35.433
NetDL3_C: DL3.C R24.2 | length 1.4
  TOP w0.15: DL3.C@64.384,40.066 DL3.C@64.384,40.066
  TOP w0.2: DL3.C@64.384,40.066 64.411,40.092 64.411,41.439 R24.2@64.384,41.466
NetDL4_C: DL4.C R25.2 | length 1.7
  TOP w0.15: DL4.C@25.691,42.16 DL4.C@25.691,42.164 25.968,42.441 26.117,42.441 26.731,43.055 26.731,43.143 R25.2@26.891,43.303
NetLOVE_X: LOVE.X U1.38 | length 56.8
  TOP w0.15: v1(43.431,38.907) 43.431,39.331 44.093,39.993 47.907,39.993 48.331,39.569 48.331,38.329 49.96,36.7 52,36.7 52.392,36.308 55.492,36.308 57.197,34.603 U1.38@58.575,34.603
  BOTTOM w0.15: LOVE.X@39.838,23.34 39.816,23.318 39.816,21.703 40.166,21.353 41.483,21.353 41.853,21.723 42.515,21.723 44.206,23.414 45.163,23.414 45.884,22.693 45.884,21.916 46.9,20.9 48.074,20.9 48.6,21.426 48.6,24.189 45.7,27.088 45.7,27.377 46.337,28.015 47.615,28.015 48.4,28.8 48.4,31.6 47.4,32.6 46.024,32.6 45.371,33.253 45.371,33.947 46.321,34.896 46.321,37.101 44.515,38.907 v1(43.431,38.907)
NetM1_7: M1.7 R56.1 R57.2 | length 25.5
  TOP w0.15: v1(8.125,17.466) v1(12.825,17.466) ; M1.7@12.25,14.5 12.25,15.191 v1(12.825,15.766)
  TOP w0.2: R57.2@4.1,31.766 v1(4.825,31.766) R56.1@5.55,31.766
  BOTTOM w0.15: v1(4.825,31.766) 5.634,31.766 7.696,29.704 7.696,17.895 v1(8.125,17.466) ; v1(12.825,15.766) v1(12.825,17.466)
NetM1_39: M1.39 R17.2 | length 6.9
  TOP w0.15: M1.39@12.25,28.5 12.25,27.441 12.727,26.964 13.519,26.964 13.721,27.166 13.721,27.843 13.519,28.045 13.519,30.635 13.169,30.985 R17.2@13.125,30.985
NetM1_40: M1.40 R18.2 | length 3.5
  TOP w0.15: M1.40@11.525,28.625 M1.40@11.4,28.5 11.4,29.041 11.525,29.166 12.125,29.166 12.225,29.266 12.225,29.662 12.229,29.666 12.229,30.687 R18.2@11.925,30.991
NetQ3_3: Q3.3 R25.1 | length 16.7
  TOP w0.15: Q3.3@12.525,45.066 12.559,45.1 13.67,45.1 v1(14.721,44.049) ; v1(23.199,43.349) 23.241,43.307 R25.1@25.941,43.307
  BOTTOM w0.15: v1(14.721,44.049) 14.721,45.116 15.316,45.711 21.669,45.711 23.199,44.181 v1(23.199,43.349)
NetR7_2: R7.2 U1.27 | length 9.8
  TOP w0.15: U1.27@54,30.028 54,29.328 54.166,29.162 59.191,29.162 59.941,29.912 59.941,30.572 59.694,30.82 59.694,31.884 60.171,32.361 R7.2@60.171,32.376
NetR13_2: R13.2 R15.2 U1.16 uC_VBUS.X | length 5.2
  TOP w0.15: R13.2@44.171,35.676 44.171,35.051 uC_VBUS.X@44.646,34.576 45.121,34.101 R15.2@45.121,33.476 ; R15.2@45.125,33.456 45.325,33.256 45.325,33.223 45.623,32.924 45.623,32.527 46.047,32.103 U1.16@46.925,32.103
NetR15_1: R15.1 R19.1 | length 1.1
  TOP w0.15: R19.1@44.171,32.376 44.173,32.378 44.173,33.504 R15.1@44.175,33.506
NetR37_1: R37.1 U3.2 | length 2.6
  TOP w0.15: R37.1@24.025,20.525 24.882,20.525 25.211,20.196 25.972,20.196 26.075,20.299 U3.2@26.075,20.7
NetR43_2: R43.2 R44.2 U3.12 | length 4
  TOP w0.15: R44.2@22.925,23.475 22.927,23.475 23.47,24.018 v1(23.47,24.03) 23.384,24.116 23.384,24.381 22.94,24.825 R43.2@22.925,24.825 ; v1@24.942,23.706 25.535,23.706 25.575,23.666 U3.12@25.575,23.5
  BOTTOM w0.15: v1(23.47,24.03) 24.438,24.03 24.674,23.794 v1(24.732,23.794)
NetR45_2: R45.2 U4.18 | length 2.2
  TOP w0.15: R45.2@17.046,36.101 17.046,35.576 17.696,34.926 U4.18@17.696,34.176
NetR46_2: R46.2 U4.19 | length 2.6
  TOP w0.15: R46.2@15.946,36.101 15.996,36.101 16.197,35.901 16.317,35.901 17.296,34.922 U4.19@17.296,34.176
NetR47_2: R47.2 U4.12 | length 2.6
  TOP w0.15: U4.12@20.096,34.176 20.096,34.751 20.241,34.896 20.519,34.896 20.814,35.19 20.814,35.648 20.361,36.101 R47.2@20.346,36.101
NetR48_2: R48.2 U4.11 | length 2.5
  TOP w0.15: U4.11@20.496,34.176 20.811,34.176 21.106,34.471 21.106,35.761 R48.2@21.446,36.101
NetR49_1: R49.1 U4.6 | length 3.5
  TOP w0.15: U4.6@18.896,32.376 18.896,32.976 18.998,33.078 20.894,33.078 21.171,32.801 R49.1@21.596,32.801
NetR59_1: R59.1 R60.2 U1.49 | length 38.8
  TOP w0.15: R60.2@26.875,44.3 27.38,44.3 27.537,44.143 27.537,42.957 27.849,42.646 27.849,41.318 27.673,41.143 v1(27.673,41.021) R59.1@26.891,41.021 ; v1(48.7,40.1) 48.7,38.352 49.708,37.344 53.496,37.344 56.5,40.348 U1.49@56.5,41.678
  BOTTOM w0.15: v1(27.673,41.021) 27.795,41.021 27.952,40.864 46.516,40.864 47.316,40.064 48.664,40.064 v1(48.7,40.1)
OFF_1: JOFF.1 R35.2 U3.7 | length 35
  TOP w0.15: v1(16.917,5.554) 17.78,4.691 JOFF.1@17.78,2.54 ; v1(22,21.3) 22.025,21.275 R35.2@22.925,21.275 ; U3.7@28.075,23.5 28.472,23.5 28.696,23.724 28.696,24.087 v1(28.708,24.099)
  BOTTOM w0.15: v1(16.917,5.554) 15.077,7.394 15.077,12.085 17.215,14.223 19.25,14.223 20.512,15.485 20.512,20.84 20.973,21.3 v1(22,21.3) 24.196,21.3 24.6,21.704 24.6,22.5 26,23.9 27.46,23.9 27.618,23.743 28.352,23.743 v1(28.708,24.099)
P000_AN00_AMP+_1: JANALOG.10 U1.64 | length 66.7
  TOP w0.15: U1.64@49,41.678 49,43.9 50.846,45.746 55.624,45.746 55.878,46 v1(55.9,46)
  BOTTOM w0.15: JANALOG.10@53.34,2.54 55.183,4.383 57.303,4.383 60.4,7.48 60.4,9.5 63.521,12.621 63.521,22.404 59.373,26.553 56.549,26.553 55.016,28.086 55.016,31.158 58.6,34.743 58.6,36.3 55.9,39 v1(55.9,46)
P001_AN01_AMP-_1: JANALOG.11 U1.63 | length 64.2
  TOP w0.15: U1.63@49.5,41.678 49.5,43.7 51.104,45.304 56.204,45.304 v1(56.6,45.7)
  BOTTOM w0.15: JANALOG.11@55.88,2.54 57.14,3.8 57.62,3.8 60.9,7.08 60.9,9.293 63.9,12.293 63.9,22.417 59.264,27.053 56.756,27.053 55.516,28.293 55.516,30.951 59.1,34.536 59.1,36.507 56.6,39.007 56.6,45.09 56.598,45.092 56.598,45.698 v1(56.6,45.7)
P002_AN02_AMPO_1: JANALOG.12 U1.62 | length 63.1
  TOP w0.15: U1.62@50,41.678 50,43.7 51.142,44.842 56.842,44.842 v1(57.5,45.5)
  BOTTOM w0.15: v1(57.5,45.5) 57.1,45.1 57.1,39.214 59.6,36.714 59.6,34.329 56.016,30.744 56.016,28.5 56.963,27.553 59.156,27.553 64.3,22.409 64.3,11.986 61.4,9.086 61.4,6.8 58.42,3.82 JANALOG.12@58.42,2.54
P003_1: R27.2 U1.61 | length 50.8
  TOP w0.15: v1(49.582,40.07) 49.668,40.156 49.899,40.156 50.5,40.756 U1.61@50.5,41.678 ; v1(56.661,10.109) 56.661,9.99 59.582,9.99 61.2,11.608 61.2,13.04 60.931,13.309 60.931,14.135 60.361,14.706 60.361,15.306 R27.2@60.35,15.316
  BOTTOM w0.15: v1(49.582,40.07) 49.595,40.057 49.595,39.695 49.801,39.489 49.801,39.073 49.8,38.28 49.265,37.745 49.265,36.431 48.65,35.816 48.042,35.816 47.507,35.281 47.507,34.01 49.314,32.203 49.314,25.892 53.719,21.488 56.277,21.488 58.09,19.675 58.09,18.608 59.825,16.872 59.825,13.344 56.661,10.179 v1(56.661,10.109)
P004_1: R28.2 U1.60 | length 37.3
  TOP w0.15: U1.60@51,41.678 51,40.7 51.15,40.55 51.156,40.55 51.313,40.393 v1(51.435,40.393) ; R28.2@60.35,16.716 60.361,16.706 60.361,16.106 60.931,15.535 60.931,14.835 ; 60.948,14.808 61.465,14.291 v1(61.465,14.25)
  BOTTOM w0.15: v1(51.435,40.393) 51.031,39.989 51.031,37.945 50.373,37.286 50.373,33.764 50.145,33.536 50.145,26.236 54.063,22.319 56.621,22.319 58.921,20.019 58.921,18.952 60.656,17.217 60.656,15.1 61.465,14.291 v1(61.465,14.25)
P011_1: R29.2 U1.58 | length 37
  TOP w0.15: v1(51.638,39.589) 52,39.951 U1.58@52,41.678 ; R29.2@60.35,18.116 60.361,18.106 60.361,17.506 60.931,16.935 60.931,16.235 61.45,15.716 v1(61.45,15.016)
  BOTTOM w0.15: v1(51.638,39.589) 51.308,39.259 51.308,37.83 50.65,37.171 50.65,33.649 50.422,33.422 50.422,26.351 54.177,22.596 56.736,22.596 59.198,20.134 59.198,19.067 60.933,17.331 60.933,15.467 61.384,15.016 v1(61.45,15.016)
P012_1: R30.2 U1.55 | length 36.1
  TOP w0.15: v1(52.758,40.081) 53.412,40.081 53.5,40.169 U1.55@53.5,41.678 ; R30.2@60.35,19.516 60.361,19.506 60.361,18.906 60.943,18.323 60.943,17.623 61.45,17.116 v1(61.45,16.516)
  BOTTOM w0.15: v1(52.758,40.081) 52.758,39.999 51.585,38.826 51.585,37.715 50.927,37.057 50.927,33.535 50.699,33.307 50.699,26.466 54.292,22.873 56.851,22.873 59.475,20.249 59.475,19.182 61.45,17.206 v1(61.45,16.516)
P013_1: R31.2 U1.54 | length 34.6
  TOP w0.15: v1(52.379,38.459) 52.379,38.993 52.788,39.402 53.194,39.402 54,40.208 U1.54@54,41.678 ; R31.2@60.35,20.916 60.361,20.906 60.361,20.306 60.948,19.719 60.948,19.019 61.45,18.516 v1(61.45,17.916)
  BOTTOM w0.15: v1(52.379,38.459) 51.862,37.942 51.862,37.6 51.204,36.942 51.204,32.965 50.976,32.738 50.976,26.581 54.407,23.15 56.965,23.15 59.8,20.315 59.8,19.5 61.384,17.916 v1(61.45,17.916)
P014_AN09_DAC_1: JANALOG.9 U1.53 | length 63.6
  TOP w0.15: U1.53@54.5,41.678 54.5,42.629 54.813,42.942 57.433,42.942 57.698,42.677 v1(57.701,42.677)
  BOTTOM w0.15: JANALOG.9@50.8,2.54 51.84,1.5 59.136,1.5 59.528,1.892 59.528,4.057 61.9,6.429 61.9,8.879 64.7,11.679 64.7,22.401 59.048,28.053 57.17,28.053 56.516,28.708 56.516,30.537 60.1,34.121 60.1,36.921 57.701,39.321 v1(57.701,42.677)
P015_1: R32.2 U1.52 | length 33.6
  TOP w0.15: v1(53.042,38.761) 53.042,38.859 55,40.816 U1.52@55,41.678 ; R32.2@60.35,22.316 60.361,22.306 60.361,21.59 60.948,21.002 60.948,20.193 61.45,19.691 v1(61.45,19.316)
  BOTTOM w0.15: v1(53.042,38.761) 53.039,38.758 53.039,38.386 51.481,36.827 51.481,32.85 51.253,32.623 51.253,26.695 54.522,23.427 57.08,23.427 60.166,20.341 60.166,19.734 60.584,19.316 v1(61.45,19.316)
P100_AN22_SCL_1: JANALOG.14 JDIGITAL.18 R4.1 U1.48 | length 108.5
  TOP w0.15: JDIGITAL.18@18.796,50.8 18.796,49.604 20.081,48.319 20.081,47.734 R4.1@20.066,47.719 ; JDIGITAL.18@18.796,50.863 18.796,51.054 20.377,52.635 26.896,52.635 27.732,51.799 27.732,49.984 29.673,48.044 40.42,48.044 43.181,45.283 46.583,45.283 49,47.7 59.231,47.7 v1(59.74,47.191) ; U1.48@58.808,39.602 59.402,39.602 v1(59.8,40) ; v1(63.825,31.768) 63.825,33.006 63.821,33.01 63.821,34.04 63.295,34.567 63.295,36.64 63.295,36.7 63.898,37.303 63.898,37.753 v1(63.83,37.822)
  BOTTOM w0.15: v1(59.74,47.191) 59.8,47.131 v1(59.8,40) 60.316,39.484 60.316,38.976 61.523,37.769 62.775,37.769 62.92,37.914 63.737,37.914 v1(63.83,37.822) ; JANALOG.14@63.5,2.54 63.425,2.615 63.425,8.559 66.612,11.746 66.612,13.802 67.754,14.943 67.754,22.886 67.062,23.578 67.062,24.69 67.119,24.747 67.119,25.859 66.626,26.352 65.708,26.352 65.656,26.3 65,26.3 64.6,26.7 63.11,26.7 62.368,27.443 62.368,28.505 63.13,29.268 64.425,29.268 64.725,29.568 64.725,31.18 64.223,31.682 63.911,31.682 v1(63.825,31.768)
P101_AN21_SDA_1: JANALOG.13 JDIGITAL.17 R5.1 U1.47 | length 102.6
  TOP w0.15: JDIGITAL.17@21.336,50.8 21.336,49.564 22.606,48.294 R5.1@22.606,47.719 ; JDIGITAL.17@21.336,51.054 22.64,52.358 26.781,52.358 27.455,51.684 27.455,49.869 29.681,47.644 40.02,47.644 42.82,44.844 46.544,44.844 49.066,47.366 58.634,47.366 v1(59,47) ; U1.47@58.575,39.103 58.623,39.152 59.752,39.152 v1(59.8,39.2) ; v1(63.025,31.768) 63.025,32.163 63.425,32.563 63.425,34.044 63.018,34.452 63.018,36.755 63.018,36.815 63.245,37.042 63.245,37.385 v1(63.226,37.404)
  BOTTOM w0.15: v1(59,47) 59.298,46.702 59.298,39.609 59.707,39.2 v1(59.8,39.2) 59.8,39.1 61.603,37.297 63.096,37.297 63.14,37.253 63.185,37.253 63.226,37.294 v1(63.226,37.404) ; JANALOG.13@60.96,2.54 63.148,4.728 63.148,8.673 65.562,11.088 66.335,11.86 66.335,13.917 67.4,14.982 67.4,22.74 66.839,23.301 66.47,23.301 64.723,25.048 64.723,25.989 64.312,26.4 63.019,26.4 62.091,27.328 62.091,28.62 62.395,28.924 62.395,31.138 v1(63.025,31.768)
P102_SPI0_RSPCK_GPT2_B_CAN0_RX_1: J3.3 JDIGITAL.14 Q3.1 R52.2 U1.46 | length 95
  TOP w0.15: v1(9.5,44.8) 10.9,44.8 11.575,44.125 Q3.1@11.575,43.066 10.766,43.066 10.56,42.86 R52.2@9.6,42.86 ; JDIGITAL.14@28.956,51.054 30.755,52.853 43.157,52.853 44.066,51.944 44.066,50.656 45.199,49.523 59.347,49.523 61.939,46.931 61.939,41.193 61.007,40.261 60.782,40.036 v1(60.702,40.036) 60.236,40.502 58.475,40.502 57.748,39.775 57.748,38.93 58.075,38.603 U1.46@58.575,38.603 ; v1(63.699,39.394) 63.825,39.268 64.41,38.683 64.41,37.423 63.572,36.585 63.572,34.681 64.098,34.155 64.098,33.292 64.102,33.288 64.102,32.591 v1(64.925,31.768)
  BOTTOM w0.15: v1(9.5,44.8) 9.586,44.886 9.586,45.127 12.759,48.3 16.159,48.3 17.125,49.266 27.925,49.266 28.927,50.268 28.927,51.025 JDIGITAL.14@28.956,51.054 ; v1(60.702,40.036) 60.702,39.291 60.919,39.074 63.38,39.074 v1(63.699,39.394) ; J3.3@63.627,27.94 65.002,29.315 65.002,31.691 v1(64.925,31.768)
P103_SPI0_SSL_GPT2_A_CAN0_TX_1: JDIGITAL.11 U1.45 | length 41.7
  TOP w0.15: JDIGITAL.11@36.576,51.054 38.066,52.544 42.866,52.544 43.666,51.744 43.666,50.456 44.878,49.244 58.926,49.244 61.662,46.508 61.662,41.307 61.134,40.779 58.36,40.779 57.471,39.89 57.471,38.34 57.707,38.103 U1.45@58.575,38.103
P104_IRQ01_GPT1_B_1: JDIGITAL.3 U1.44 | length 17.1
  TOP w0.15: JDIGITAL.3@58.42,51.054 62.216,47.258 62.216,40.84 59.93,38.554 59.93,38.042 59.491,37.603 U1.44@58.575,37.603
P105_IRQ00_GPT1_A_1: JDIGITAL.4 U1.43 | length 21.9
  TOP w0.15: JDIGITAL.4@55.88,51.054 56.64,51.814 59.308,51.814 59.662,51.46 59.662,50.538 62.493,47.707 62.493,40.725 60.207,38.439 60.207,37.927 59.383,37.103 U1.43@58.575,37.103
P106_GPT0_B_1: JDIGITAL.5 U1.42 | length 27.1
  TOP w0.15: U1.42@58.575,36.603 59.275,36.603 60.484,37.813 60.484,38.325 62.77,40.611 62.77,49.33 62.406,49.694 62.246,49.854 v1(62.246,49.976)
  BOTTOM w0.15: JDIGITAL.5@53.34,51.054 54.462,52.176 61.946,52.176 62.246,51.876 v1(62.246,49.976)
P107_GPT0_A_1: JDIGITAL.6 U1.41 | length 32.8
  TOP w0.15: JDIGITAL.6@50.8,51.054 51.837,52.091 64.131,52.091 64.546,51.676 64.546,50.176 63.047,48.677 63.047,40.447 60.761,38.161 60.761,37.596 59.853,36.688 59.844,36.688 59.259,36.103 U1.41@58.575,36.103
P108_SWDIO_1: SWDIO.X U1.33 U4.14 | length 68
  TOP w0.15: U4.14@19.296,34.176 19.296,34.942 19.782,35.428 19.782,37.646 20.982,38.846 27.686,38.846 28.08,38.452 28.08,37.344 28.734,36.69 cw(c28.628,36.584) 28.778,36.584 28.778,36.113 cw(c28.276,36.113) 28.778,36.11 28.772,33.407 28.772,29.153 ccw(c29.594,29.153) 29.594,28.332 52.234,28.332 52.238,28.328 60.845,28.328 61.373,28.855 61.373,29.322 62.446,30.395 62.446,32.635 cw(c62.787,32.635) 62.546,32.876 ccw(c61.58,33.842) 62.946,33.842 62.946,33.852 ccw(c62.519,33.852) 62.264,34.194 62.146,34.076 62.028,34.194 ccw(c61.773,33.852) 61.346,33.852 61.346,33.842 ccw(c62.712,33.842) 61.367,33.605 ; U1.33@58.582,32.096 59.388,32.096 59.476,32.184 59.476,32.929 59.967,33.42 SWDIO.X@60.602,33.42 ; 60.061,33.421 SWDIO.X@60.602,33.421 ; SWDIO.X@60.65,33.372 SWDIO.X@60.602,33.42 ; SWDIO.X@60.65,33.416 61.191,33.416 ccw(c61.191,33.594) 61.369,33.594
P109_SCI9_TXD_1: R22.1 R48.1 U1.34 | length 43.5
  TOP w0.15: R48.1@21.446,37.051 21.446,37.979 21.755,38.288 24.633,38.288 v1(25.231,37.689) 25.246,37.704 25.926,37.704 R22.1@25.941,37.719 ; v1(48.625,36.503) 49.029,36.503 49.478,36.054 50.722,36.054 50.929,35.847 52.07,35.847 52.162,35.754 55.16,35.754 57.367,33.547 57.367,33.114 57.878,32.603 U1.34@58.575,32.603
  BOTTOM w0.15: v1(25.231,37.689) 25.317,37.603 25.58,37.603 25.754,37.429 27.546,37.429 29.831,39.714 45.605,39.714 47.817,37.501 47.817,37.311 v1(48.625,36.503)
P110_SCI9_RXD_1: R47.1 U1.35 | length 43.2
  TOP w0.15: R47.1@20.346,37.051 20.346,37.51 21.401,38.565 27.124,38.565 27.535,38.154 v1(27.561,38.154) ; v1(48.64,37.283) 49.593,36.331 50.837,36.331 51.044,36.124 52.184,36.124 52.277,36.031 55.274,36.031 57.644,33.662 57.644,33.256 57.797,33.103 U1.35@58.575,33.103
  BOTTOM w0.15: v1(27.561,38.154) 29.44,40.033 45.903,40.033 48.64,37.296 v1(48.64,37.283)
P111_GPT3_A_1: JDIGITAL.7 U1.36 | length 40.4
  TOP w0.15: JDIGITAL.7@48.26,51.054 49.897,52.691 64.315,52.691 65.1,51.905 65.1,49.947 63.69,48.537 63.69,40.229 62.667,39.206 62.667,37.432 62.667,36.902 62.667,35.073 62.389,34.795 60.526,34.795 59.334,33.603 U1.36@58.575,33.603
P112_GPT3_B_1: JDIGITAL.8 U1.37 | length 43.4
  TOP w0.15: JDIGITAL.8@45.72,51.054 46.974,49.8 48.836,49.8 49.464,50.429 49.464,51.533 50.335,52.404 64.209,52.404 64.823,51.791 64.823,50.061 63.324,48.563 63.324,40.255 62.39,39.321 62.39,38.454 62.39,37.547 62.39,36.788 62.39,35.35 62.112,35.072 60.294,35.072 59.325,34.103 U1.37@58.575,34.103
P204_1: R33.2 U1.24 | length 21.1
  TOP w0.15: U1.24@52.5,30.028 52.49,30.038 52.49,30.795 v1(52.828,31.133) ; R33.2@60.35,23.716 60.361,23.706 60.361,23.106 60.944,22.522 60.944,21.398 61.45,20.892 v1(61.45,20.416)
  BOTTOM w0.15: v1(52.828,31.133) 53.2,30.762 53.2,25.576 55.073,23.704 57.195,23.704 60.482,20.416 v1(61.45,20.416)
P205_1: R34.2 U1.23 | length 22.2
  TOP w0.15: U1.23@52,30.028 52,31.015 52.824,31.839 v1(52.824,31.861) ; R34.2@60.35,25.116 60.361,25.106 60.361,24.506 60.95,23.916 60.95,23.216 61.455,22.711 61.455,21.616 v1(61.446,21.606)
  BOTTOM w0.15: v1(52.824,31.861) 53.477,31.208 53.477,25.775 55.165,24.087 57.203,24.087 59.684,21.606 v1(61.446,21.606)
P206_1: R2.2 U1.22 | length 16.7
  TOP w0.15: U1.22@51.5,30.028 51.5,30.984 52.309,31.793 52.309,32.056 52.42,32.168 v1(52.42,32.547) ; v1(52.698,27.73) 52.978,28.01 58.695,28.01 R2.2@60.256,26.448
  BOTTOM w0.15: v1(52.42,32.547) 52.42,32.168 52.309,32.056 52.309,31.793 51.821,31.305 51.821,28.745 52.487,28.079 52.487,28.049 52.698,27.838 v1(52.698,27.73)
P212_1: R14.2 U1.10 | length 35.3
  TOP w0.15: U1.10@46.925,35.103 47.634,35.103 v1(48.331,34.407) ; v1(58.7,10.9) 59.7,10.9 60.361,11.561 60.361,12.506 R14.2@60.35,12.516
  BOTTOM w0.15: v1(48.331,34.407) 48.331,33.969 49.868,32.433 49.868,26.122 53.948,22.042 56.506,22.042 58.644,19.904 58.644,18.838 60.379,17.102 60.379,12.479 58.8,10.9 v1(58.7,10.9)
P213_1: R16.2 U1.9 | length 40
  TOP w0.15: U1.9@46.925,35.603 47.625,35.603 47.975,35.253 48.313,35.253 v1(48.35,35.216) ; v1(58.003,10.496) 58.394,10.496 58.492,10.398 59.598,10.398 60.893,11.693 60.893,12.773 60.361,13.306 R16.2@60.361,13.906
  BOTTOM w0.15: v1(48.35,35.216) 48.278,35.216 47.784,34.722 47.784,34.124 49.591,32.318 49.591,26.007 53.833,21.765 56.392,21.765 58.367,19.79 58.367,18.723 60.102,16.987 60.102,13.012 58.003,10.913 v1(58.003,10.496)
P300_SWCLK_1: SWCLK.X U1.32 U4.17 | length 67
  TOP w0.15: U4.17@18.096,34.176 18.096,34.918 17.6,35.414 17.6,37.394 19.328,39.123 27.801,39.123 28.357,38.566 28.357,37.459 29.063,36.753 29.063,29.265 ccw(c29.72,29.265) 29.72,28.609 52.349,28.609 ; U1.32@56.5,30.028 56.5,29.717 56.55,29.667 v1(58.02,29.667) ; SWCLK.X@62.15,33.416 62.15,30.829 60.637,29.316 v1(60.637,28.83) 59.692,28.83 59.469,28.608 52.35,28.608 ; 52.349,28.609 52.35,28.608
  BOTTOM w0.15: v1(58.02,29.667) 58.02,29.28 58.358,28.942 60.325,28.942 60.35,28.916 60.551,28.916 v1(60.637,28.83)
P301_SCI2_RXD_1: JDIGITAL.1 U1.31 | length 29.1
  TOP w0.15: v1(55.138,32.84) 55.16,32.84 56,32 U1.31@56,30.028
  BOTTOM w0.15: v1(55.138,32.84) 55.138,33.52 54.384,34.273 54.384,47.067 56.194,48.876 62.346,48.876 63.5,50.03 JDIGITAL.1@63.5,51.054
P302_SCI2_TXD_1: JDIGITAL.2 U1.30 | length 26.2
  TOP w0.15: v1(54.589,33.358) 54.589,32.611 55.5,31.7 U1.30@55.5,30.028
  BOTTOM w0.15: v1(54.589,33.358) 54.589,33.382 54.107,33.864 54.107,47.181 56.202,49.276 59.182,49.276 JDIGITAL.2@60.96,51.054
P303_GPT7_B_1: JDIGITAL.10 U1.29 | length 36.4
  TOP w0.15: JDIGITAL.10@39.116,51.054 40.526,49.644 42.066,49.644 43.387,48.323 51.077,48.323 51.4,48 54,48 v1(54.6,48.6) ; v1(54.03,32.779) 54.053,32.756 54.053,32.404 55,31.457 U1.29@55,30.028
  BOTTOM w0.15: v1(54.03,32.779) 54.033,32.782 54.033,33.546 53.83,33.749 53.83,47.83 v1(54.6,48.6)
P304_GPT7_A_1: JDIGITAL.9 U1.28 | length 31.2
  TOP w0.15: JDIGITAL.9@41.656,51.054 JDIGITAL.9@41.656,50.8 43.856,48.6 v1(52.1,48.6) ; v1(53.531,33.338) 53.498,33.305 53.498,32.292 54.5,31.29 U1.28@54.5,30.028
  BOTTOM w0.15: JDIGITAL.9@41.653,51.051 JDIGITAL.9@41.656,51.054 ; v1(52.1,48.6) 53.544,47.156 53.544,38.553 53.531,38.54 v1(53.531,33.338)
P400_IIC0_SCL_1: P400_SCL.X Q1.3 R10.2 U1.1 | length 43.7
  TOP w0.15: U1.1@46.925,39.603 47.667,39.603 48.029,39.242 48.029,36.169 48.198,36 49.14,36 49.363,35.777 50.608,35.777 50.815,35.57 51.955,35.57 52.048,35.477 55.045,35.477 57.09,33.432 57.09,32.999 57.601,32.488 57.601,32.077 58.103,31.576 59.146,31.576 v1(59.146,31.551) ; R10.2@63.87,22.359 63.91,22.4 64.6,22.4 65.023,22.823 65.023,23.476 65.447,23.9 66.5,23.9 67.5,24.9 67.5,30.94 66.698,31.742 66.698,32.398 v1(67.2,32.9)
  TOP w0.2: Q1.3@63.27,19.034 63.27,21.326 63.845,21.902 63.845,22.335 R10.2@63.87,22.359
  BOTTOM w0.15: v1(59.146,31.551) 61.266,31.551 62.614,32.9 v1(67.2,32.9)